# Allegro board ST-LINKV3.brd
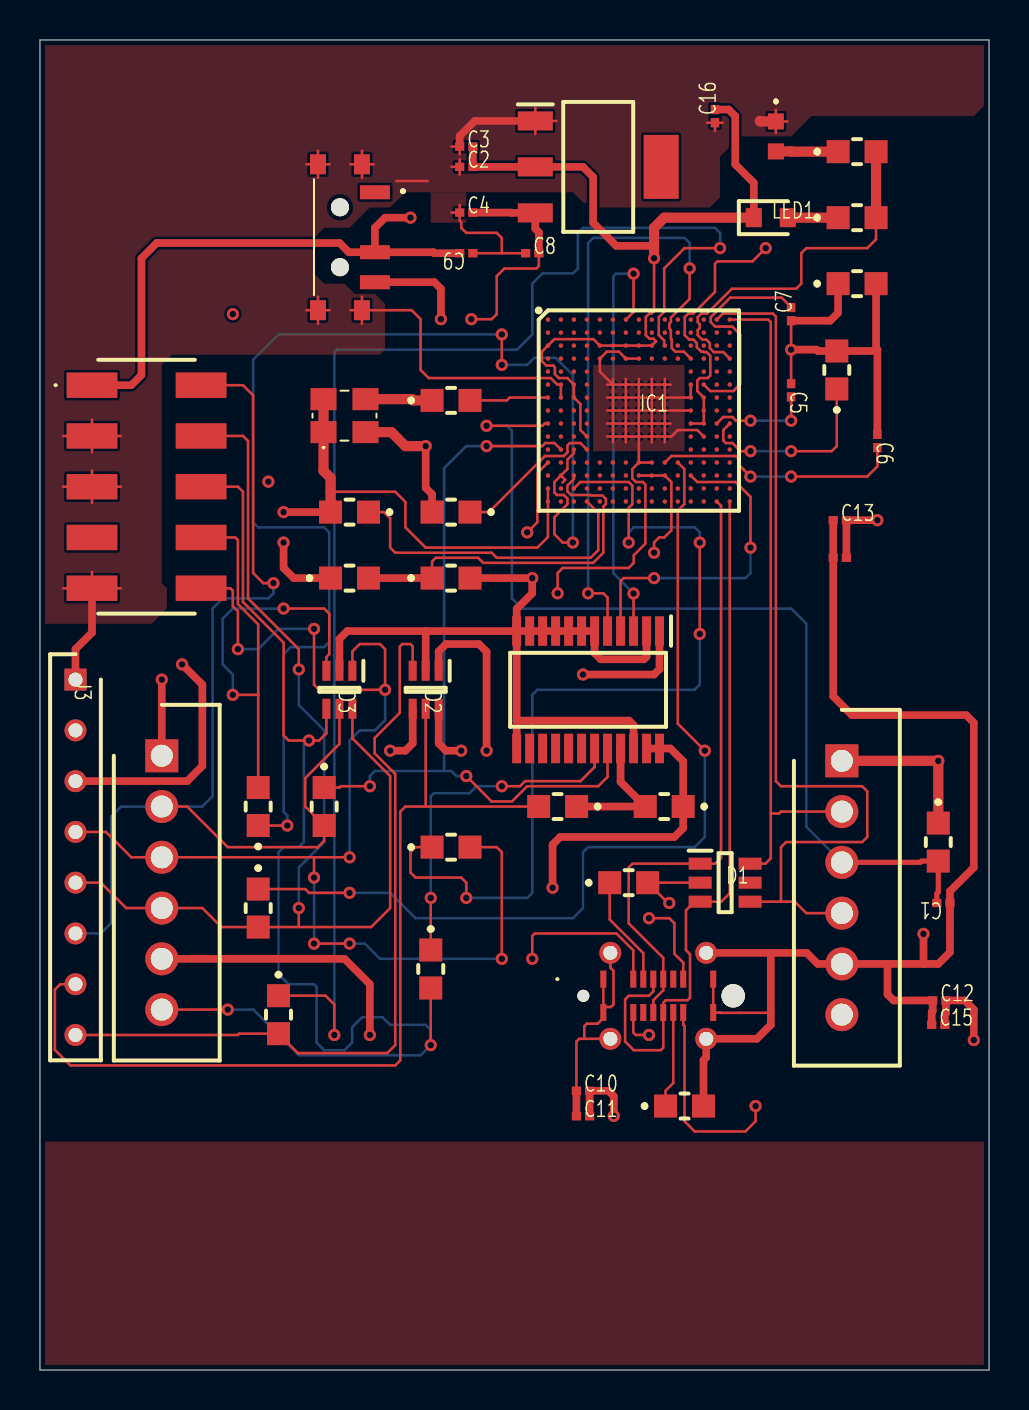
[diagram p0: board, top side]
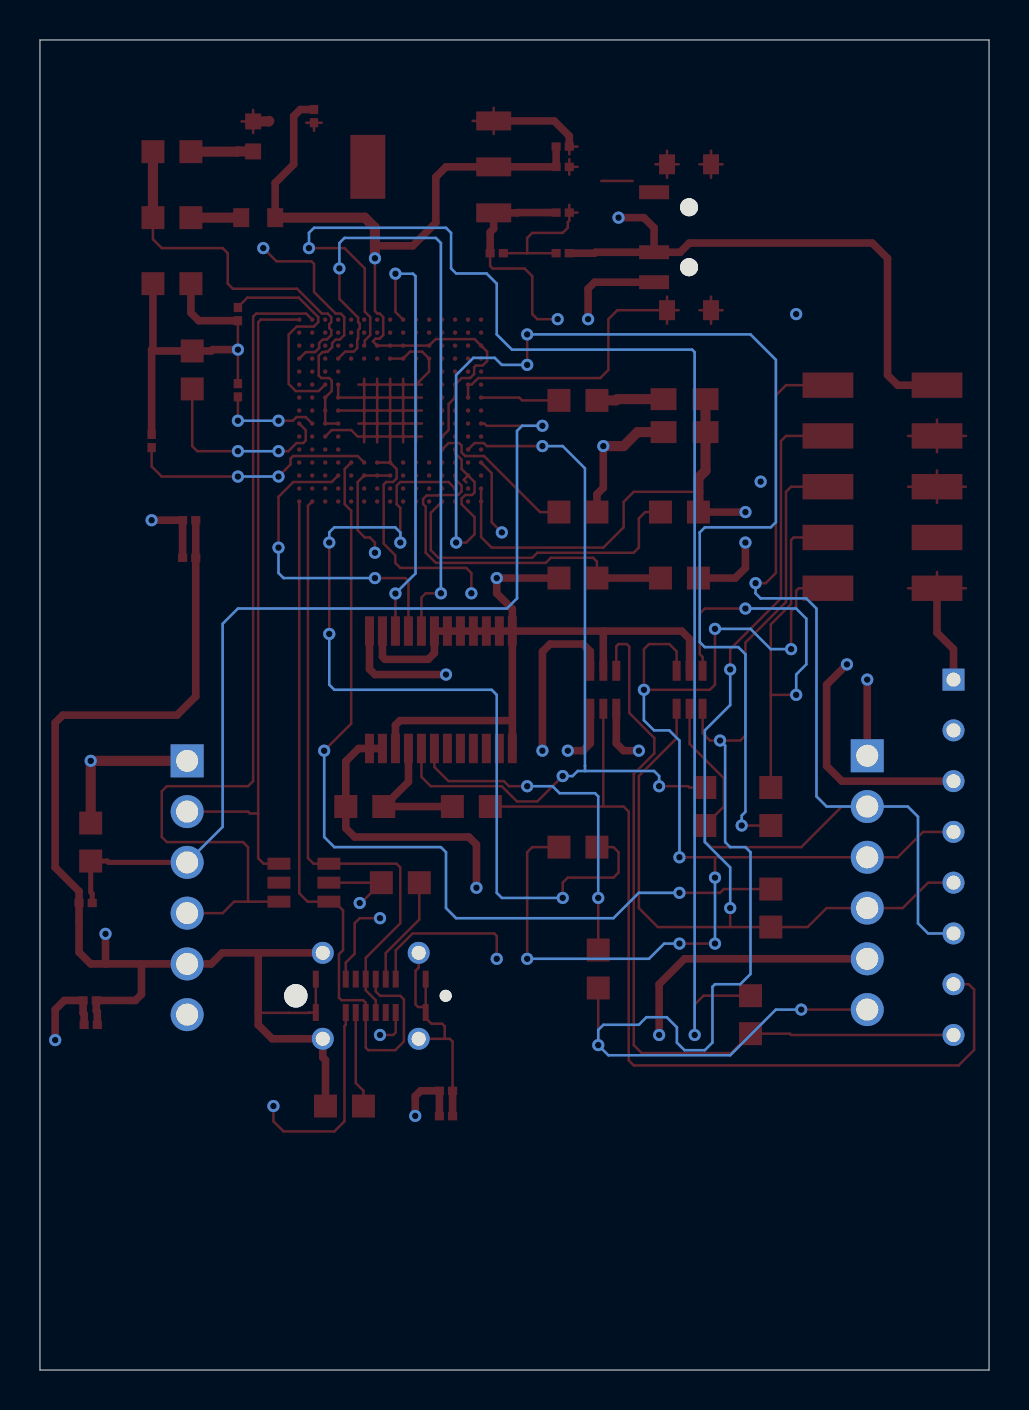
[diagram p1: board, bottom side, seen from below]

Outline 47.5 x 66.55 mm; copper layers: TOP, GND, POWER, BOTTOM. Coordinates in mm from the lower left corner of the outline.
Outline path: 0,66.55 47.5,66.55 47.5,0 0,0 0,66.55

## Design rules (mm)
constraint set DEFAULT: min track width 0.127
net group C10: nets C10 LINK_RX
net group DNDP: nets DN DP
net group L2: nets L2 TMS/SWDIO
net group L3: nets L3 TDI
net group LINK_TX: nets LINK_TX R2
net group M11: nets M11 TCLK/SWCLK
net group NRST: nets NRST P3
net group R4: nets N39518 R4
net group R6: nets R6 TDO/SWO
net group CLKDIO: nets SWCLK/PA14
net group D15: nets D15 N52044 N52750

## Placement (name value [footprint] x y rotation side)
C1  100nF  [CAPC0603X33N]  45.21 23.37 180 top
C2  100nF  [CAPC0603X33N]  21.34 60.2 0 top
C3  10uF  [CAPC0603X33N]  21.34 61.21 0 top
C4  10uF  [CAPC0603X33N]  21.34 57.91 0 top
C5  2.2uF  [CAPC0603X33N]  37.59 49.02 270 top
C6  2.2uF  [CAPC0603X33N]  41.91 46.48 270 top
C7  2.2uF  [CAPC0603X33N]  37.59 52.83 90 top
C8  100nF  [CAPC0603X33N]  24.64 55.88 0 top
C9  100nF  [CAPC0603X33N]  21.34 55.88 180 top
C10  100nF  [CAPC0603X33N]  27.18 13.97 0 top
C11  100nF  [CAPC0603X33N]  27.18 12.7 0 top
C12  100nF  [CAPC0603X33N]  45.01 18.49 0 top
C13  100nF  [CAPC0603X33N]  40.03 42.52 0 top
C14  100nF  [CAPC0603X33N]  40.03 40.64 0 top
C15  100nF  [CAPC0603X33N]  44.96 17.27 0 top
C16  100nF  [CAPC0603X33N]  33.78 62.74 90 top
D1  SRV05-4ATCT  [SOT95P280X145-6N]  34.29 24.38 0 top
D2  SMF05C.TCT  [SOT65P210X110-6N]  19.3 34.04 270 top
D3  SMF05C.TCT  [SOT65P210X110-6N]  14.99 34.04 270 top
IC1  STM32F723IEK6  [BGA201C65P15X15_1000X1000X60]  29.97 48.01 0 top
IC2  LM1117MPX-33NOPB  [SOT230P700X180-4N]  27.94 60.2 0 top
IC3  SN74LVC8T245PWR  [SOP65P640X120-24N]  27.43 34.04 270 top
J1  280372-1  [SHDR6W63P0X254_1X6_1780X500X1280P]  40.13 30.48 270 top
J2  219320-0001  [2193200001]  28.19 19.56 0 top
J3  08-0625-70  [HDRV8W51P0X254_1X8_2032X254X816P]  1.78 34.54 270 top
J4  280372-1  [SHDR6W63P0X254_1X6_1780X500X1280P]  6.1 30.73 270 top
J5  95278-401A10LF  [95278401A10LF]  5.33 44.2 270 top
LED1  SM0603GCL  [LEDC1608X60N]  36.58 57.66 0 top
LED2  -  [SM0603SRC]  36.83 61.72 180 top
R1  4.7K  [ERA6AEB1020V]  15.49 42.93 180 top
R2  4.7K  [ERA6AEB1020V]  15.49 39.62 0 top
R3  4.7K  [ERA6AEB1020V]  20.57 39.62 0 top
R4  100K  [ERA6AEB1020V]  31.24 28.19 180 top
R5  100  [ERA6AEB1020V]  40.89 54.36 0 top
R6  100K  [ERA6AEB1020V]  44.96 26.42 270 top
R7  100  [ERA6AEB1020V]  25.91 28.19 180 top
R8  100  [ERA6AEB1020V]  11.94 17.78 270 top
R9  10K  [ERA6AEB1020V]  32.26 13.21 0 top
R10  10K  [ERA6AEB1020V]  29.46 24.38 0 top
R11  10K  [ERA6AEB1020V]  20.57 42.93 180 top
R12  3K  [ERA6AEB1020V]  39.88 50.04 90 top
R13  100  [ERA6AEB1020V]  40.89 57.66 0 top
R14  100  [ERA6AEB1020V]  10.92 23.11 270 top
R15  100  [ERA6AEB1020V]  40.89 60.96 0 top
R16  100  [ERA6AEB1020V]  14.22 28.19 270 top
R17  100  [ERA6AEB1020V]  19.56 20.07 270 top
R18  100  [ERA6AEB1020V]  10.92 28.19 90 top
R19  100  [ERA6AEB1020V]  20.57 26.16 0 top
R30  100  [ERA6AEB1020V]  20.57 48.51 0 top
S1  -  [PCM12SMTR]  16.76 58.93 270 top
Y1  ASE-25.000MHZ-LC-T  [ASE24576MHZLCT]  15.24 47.75 0 top

## Library data of the parts
C1-C16 = GRM033D70E105ME15D
D1 = SRV05-4ATCT
D2 D3 = SMF05C.TCT
IC1 = STM32F723IEK6
IC2 = LM1117MPX-33NOPB
IC3 = SN74LVC8T245PWR
J1 J4 = 280372-1
J2 = 219320-0001
J3 = 08-0625-70
J5 = 95278-401A10LF
LED1 = SM0603GCL
LED2 = SM0603SRC
R1-R19 R30 = ERA-6ARB472V
S1 = PCM12SMTR
Y1 = ASE-25.000MHZ-LC-T

## Footprints (pads in the part's own frame, mm; a bottom-side part is the same pattern mirrored in y, then rotated)
95278401A10LF
  rect 1.27x2.54 smd: 1(-5.08,-2.73) 2(-5.08,2.73) 3(-2.54,-2.73) 4(-2.54,2.73) 5(0,-2.73) 6(0,2.73) 7(2.54,-2.73) 8(2.54,2.73) 9(5.08,-2.73) 10(5.08,2.73)
2193200001
  round 0.6 hole 0.6 unplated: (-1,-0.835)
  round 1.17 hole 1.17 unplated: (6.5,-0.835)
  rect 0.3x0.85 smd: A1(0,0) A4(1.5,0) A5(2,0) A6(2.5,0) A7(3,0) A8(3.5,0) A9(4,0) A12(5.5,0) B1(5.5,-1.67) B4(4,-1.67) B5(3.5,-1.67) B6(3,-1.67) B7(2.5,-1.67) B8(2,-1.67) B9(1.5,-1.67) B12(0,-1.67)
  round 1.1 hole 0.7: MH3(0.35,1.315) MH4(5.15,1.315) MH5(5.15,-2.985) MH6(0.35,-2.985)
ASE24576MHZLCT
  rect 1.3x1.1 smd: 1(-1.05,-0.825) 2(1.05,-0.825) 3(1.05,0.825) 4(-1.05,0.825)
BGA201C65P15X15_1000X1000X60
  round 0.224 smd: A1(-4.55,4.55) A2(-3.9,4.55) A3(-3.25,4.55) A4(-2.6,4.55) A5(-1.95,4.55) A6(-1.3,4.55) A7(-0.65,4.55) A8(0,4.55) A9(0.65,4.55) A10(1.3,4.55) A11(1.95,4.55) A12(2.6,4.55) A13(3.25,4.55) A14(3.9,4.55) A15(4.55,4.55) B1(-4.55,3.9) B2(-3.9,3.9) B3(-3.25,3.9) B4(-2.6,3.9) B5(-1.95,3.9) B6(-1.3,3.9) B7(-0.65,3.9) B8(0,3.9) B9(0.65,3.9) B10(1.3,3.9) B11(1.95,3.9) B12(2.6,3.9) B13(3.25,3.9) B14(3.9,3.9) B15(4.55,3.9) C1(-4.55,3.25) C2(-3.9,3.25) C3(-3.25,3.25) C4(-2.6,3.25) C5(-1.95,3.25) C6(-1.3,3.25) C7(-0.65,3.25) C8(0,3.25) C9(0.65,3.25) C10(1.3,3.25) C11(1.95,3.25) C12(2.6,3.25) C13(3.25,3.25) C14(3.9,3.25) C15(4.55,3.25) D1(-4.55,2.6) D2(-3.9,2.6) D3(-3.25,2.6) D4(-2.6,2.6) D5(-1.95,2.6) D6(-1.3,2.6) D7(-0.65,2.6) D8(0,2.6) D9(0.65,2.6) D10(1.3,2.6) D11(1.95,2.6) D12(2.6,2.6) D13(3.25,2.6) D14(3.9,2.6) D15(4.55,2.6) E1(-4.55,1.95) E2(-3.9,1.95) E3(-3.25,1.95) E4(-2.6,1.95) E12(2.6,1.95) E13(3.25,1.95) E14(3.9,1.95) E15(4.55,1.95) F1(-4.55,1.3) F2(-3.9,1.3) F3(-3.25,1.3) F4(-2.6,1.3) F6(-1.3,1.3) F7(-0.65,1.3) F8(0,1.3) F9(0.65,1.3) F10(1.3,1.3) F12(2.6,1.3) F13(3.25,1.3) F14(3.9,1.3) F15(4.55,1.3) G1(-4.55,0.65) G2(-3.9,0.65) G3(-3.25,0.65) G4(-2.6,0.65) G6(-1.3,0.65) G7(-0.65,0.65) G8(0,0.65) G9(0.65,0.65) G10(1.3,0.65) G12(2.6,0.65) G13(3.25,0.65) G14(3.9,0.65) G15(4.55,0.65) H1(-4.55,0) H2(-3.9,0) H3(-3.25,0) H4(-2.6,0) H6(-1.3,0) H7(-0.65,0) H8(0,0) H9(0.65,0) H10(1.3,0) H12(2.6,0) H13(3.25,0) H14(3.9,0) H15(4.55,0) J1(-4.55,-0.65) J2(-3.9,-0.65) J3(-3.25,-0.65) J4(-2.6,-0.65) J6(-1.3,-0.65) J7(-0.65,-0.65) J8(0,-0.65) J9(0.65,-0.65) J10(1.3,-0.65) J12(2.6,-0.65) J13(3.25,-0.65) J14(3.9,-0.65) J15(4.55,-0.65) K1(-4.55,-1.3) K2(-3.9,-1.3) K3(-3.25,-1.3) K4(-2.6,-1.3) K6(-1.3,-1.3) K7(-0.65,-1.3) K8(0,-1.3) K9(0.65,-1.3) K10(1.3,-1.3) K12(2.6,-1.3) K13(3.25,-1.3) K14(3.9,-1.3) K15(4.55,-1.3) L1(-4.55,-1.95) L2(-3.9,-1.95) L3(-3.25,-1.95) L4(-2.6,-1.95) L12(2.6,-1.95) L13(3.25,-1.95) L14(3.9,-1.95) L15(4.55,-1.95) M1(-4.55,-2.6) M2(-3.9,-2.6) M3(-3.25,-2.6) M4(-2.6,-2.6) M5(-1.95,-2.6) M6(-1.3,-2.6) M7(-0.65,-2.6) M8(0,-2.6) M9(0.65,-2.6) M10(1.3,-2.6) M11(1.95,-2.6) M12(2.6,-2.6) M13(3.25,-2.6) M14(3.9,-2.6) M15(4.55,-2.6) N1(-4.55,-3.25) N2(-3.9,-3.25) N3(-3.25,-3.25) N4(-2.6,-3.25) N5(-1.95,-3.25) N6(-1.3,-3.25) N7(-0.65,-3.25) N8(0,-3.25) N9(0.65,-3.25) N10(1.3,-3.25) N11(1.95,-3.25) N12(2.6,-3.25) N13(3.25,-3.25) N14(3.9,-3.25) N15(4.55,-3.25) P1(-4.55,-3.9) P2(-3.9,-3.9) P3(-3.25,-3.9) P4(-2.6,-3.9) P5(-1.95,-3.9) P6(-1.3,-3.9) P7(-0.65,-3.9) P8(0,-3.9) P9(0.65,-3.9) P10(1.3,-3.9) P11(1.95,-3.9) P12(2.6,-3.9) P13(3.25,-3.9) P14(3.9,-3.9) P15(4.55,-3.9) R1(-4.55,-4.55) R2(-3.9,-4.55) R3(-3.25,-4.55) R4(-2.6,-4.55) R5(-1.95,-4.55) R6(-1.3,-4.55) R7(-0.65,-4.55) R8(0,-4.55) R9(0.65,-4.55) R10(1.3,-4.55) R11(1.95,-4.55) R12(2.6,-4.55) R13(3.25,-4.55) R14(3.9,-4.55) R15(4.55,-4.55)
CAPC0603X33N
  rect 0.46x0.42 smd: 1(-0.33,0) 2(0.33,0)
ERA6AEB1020V
  rect 1.15x1.15 smd: 1(-0.95,0) 2(0.95,0)
HDRV8W51P0X254_1X8_2032X254X816P
  rect 1.1x1.1 hole 0.7: 1(0,0)
  round 1.1 hole 0.7: 2(2.54,0) 3(5.08,0) 4(7.62,0) 5(10.16,0) 6(12.7,0) 7(15.24,0) 8(17.78,0)
LEDC1608X60N
  rect 0.8x0.95 smd: 1(-0.85,0) 2(0.85,0)
PCM12SMTR
  round 0.9 hole 0.9 unplated: (0.75,-1.75) (3.75,-1.75)
  rect 0.7x1.5 smd: 1(0,0) 2(3,0) 3(4.5,0)
  rect 1x0.8 smd: MP1(-1.4,-0.65) MP2(-1.4,-2.85) MP3(5.9,-2.85) MP4(5.9,-0.65)
SHDR6W63P0X254_1X6_1780X500X1280P
  rect 1.65x1.65 hole 1.1: 1(0,0)
  round 1.65 hole 1.1: 2(2.54,0) 3(5.08,0) 4(7.62,0) 5(10.16,0) 6(12.7,0)
SM0603SRC
  rect 0.8x0.8 smd: 1(0,-0.75) 2(0,0.75)
SOP65P640X120-24N
  rect 1.475x0.45 smd: 1(-2.938,3.575) 2(-2.938,2.925) 3(-2.938,2.275) 4(-2.938,1.625) 5(-2.938,0.975) 6(-2.938,0.325) 7(-2.938,-0.325) 8(-2.938,-0.975) 9(-2.938,-1.625) 10(-2.938,-2.275) 11(-2.938,-2.925) 12(-2.938,-3.575) 13(2.938,-3.575) 14(2.938,-2.925) 15(2.938,-2.275) 16(2.938,-1.625) 17(2.938,-0.975) 18(2.938,-0.325) 19(2.938,0.325) 20(2.938,0.975) 21(2.938,1.625) 22(2.938,2.275) 23(2.938,2.925) 24(2.938,3.575)
SOT65P210X110-6N
  rect 1x0.4 smd: 1(-0.95,0.65) 2(-0.95,0) 3(-0.95,-0.65) 4(0.95,-0.65) 5(0.95,0) 6(0.95,0.65)
SOT95P280X145-6N
  rect 1.15x0.6 smd: 1(-1.25,0.95) 2(-1.25,0) 3(-1.25,-0.95) 4(1.25,-0.95) 5(1.25,0) 6(1.25,0.95)
SOT230P700X180-4N
  rect 1.75x0.95 smd: 1(-3.15,2.3) 2(-3.15,0) 3(-3.15,-2.3)
  rect 1.75x3.2 smd: 4(3.15,0)

## Nets
+3V3: C2.2 C3.2 C10.2 C11.2 C12.2 C13.2 C14.2 C15.2 C16.2 D2.4 IC1.C1 IC1.C5 IC1.C6 IC1.C7 IC1.C8 IC1.C9 IC1.F3 IC1.G3 IC1.G13 IC1.H13 IC1.J12 IC1.J13 IC1.K4 IC1.N8 IC1.N9 IC1.N10 IC1.P1 IC1.R1 IC2.2 IC3.1 J1.1 J3.3 LED1.1(\K\) R1.2 R6.1 S1.3(\NO\) Y1.1 Y1.4(\VDD\)
VBUS: C4.2 C8.2 D1.5(\VCC\) D2.6 IC2.3 J2.A4 J2.A9 J2.B4 J2.B9 J3.2
0: C1.1 C2.1 C3.1 C4.1 C5.1 C6.1 C7.1 C8.1 C9.1 C10.1 C11.1 C12.1 C13.1 C14.1 C15.1 C16.1 D1.2 D2.2(\COMMON_ANODE\) D3.2(\COMMON_ANODE\) IC1.D5 IC1.D7 IC1.D8 IC1.F2 IC1.F6 IC1.F7 IC1.F8 IC1.F9(\VSS_9\) IC1.F10 IC1.F12 IC1.G2 IC1.G6 IC1.G7 IC1.G8 IC1.G9 IC1.G10 IC1.G12 IC1.H6 IC1.H7 IC1.H8 IC1.H9 IC1.H10 IC1.H12 IC1.J6 IC1.J7 IC1.J8 IC1.J9 IC1.J10 IC1.K6 IC1.K7 IC1.K8 IC1.K9 IC1.K10 IC1.K13 IC1.M1 IC1.M8 IC1.M9 IC2.1 IC3.2 IC3.6 IC3.7 IC3.8 IC3.9 IC3.10 IC3.11 IC3.12 IC3.13 IC3.22 J1.5 J2.A1 J2.A12 J2.B1 J2.B12 J2.MH3 J2.MH4 J2.MH5 J2.MH6 J3.1 J4.5 J5.3 J5.5 J5.9 LED2.1 R3.2 R5.1 R5.2 R9.2 R10.2 R11.2 R12.2 S1.MP1 S1.MP2 S1.MP3 S1.MP4 Y1.2
A7: IC1.A7 IC3.3
C5: C5.2 IC1.J14
C10: IC1.C10 R8.1
D12: IC1.D12 IC3.5
D15: IC1.D15 R13.2 R15.2
DN: D1.1 IC1.R14 J2.A7 J2.B7
DP: D1.3 IC1.R15 J2.A6(\[DP1\) J2.B6
F13: C7.2 IC1.F13
J1: C1.2 IC1.J1 J1.3 R6.2
J15: IC1.J15 R12.1
L2: IC1.L2 IC3.20 R16.1
L3: IC1.L3 IC1.N2 R18.1
L4: IC1.L4 R11.1
LINK_RX: D2.3 J3.8 R8.2
LINK_TX: D2.5 J3.7 R7.2
M10: C6.2 IC1.M10
M11: IC1.M11 R14.1
N12: IC1.N12 IC3.4
NRST: D3.1 J3.4 J4.3 J5.10 R19.2
P3: IC1.P3 R19.1
PA0: IC1.N3 R2.2 R3.1
PB1: IC1.R4 R1.1
R2: IC3.21 R4.2 R7.1
R4: IC1.G1 R30.2
R6: IC3.19 R17.1
R9: J2.B5 R9.1
R10: J2.A5 R10.1
SWCLK/PA14: D1.4 IC1.A14 J1.4
SWDIO/PA13: D1.6 IC1.A15 J1.2
TCLK/SWCLK: D3.6 J3.5 J4.4 J5.4 R14.2
TDI: D3.3 J5.8 R18.2
TDO/SWO: D3.4 J4.6 J5.6 R17.2
TMS/SWDIO: D3.5 J3.6 J4.2 J5.2 R16.2
VSENS: C9.2 D2.1 IC3.23 IC3.24(\VCCB_2\) J4.1 J5.1 R2.1 R4.1 S1.2
N39518: R30.1 Y1.3
N52044: LED2.2(\K\) R15.1
N52750: LED1.2 R13.1

Pads without a net: IC1 A1 A2 A3 A4 A5 A6 A8 A9 A10 A11 A12 A13 B1 B2 B3 B4 B5 B6 B7 B8 B9 B10 B11 B12 B13 B14 B15 C2 C3 C4 C11 C12 C13 C14 C15 D1 D2 D3 D4 D6 D9 D10 D11 D13 D14 E1 E2 E3 E4 E12 E13 E14 E15 F1 F4 F14 F15 G4 G14 G15 H1 H2 H3 H4 H14 H15 J2 J3 J4 K1 K2 K3 K12 K14 K15 L1 L12 L13 L14 L15 M2 M3 M4 M5 M6 M7 M12 M13 M14 M15 N1 N4 N5 N6 N7 N11 N13 N14 N15 P2 P4 P5 P6 P7 P8 P9 P10 P11 P12 P13 P14 P15 R2 R3 R5 R6 R7 R8 R9 R10 R11 R12 R13; IC2 4; IC3 14 15 16 17 18; J1 6; J2 A8 B8; J5 7; S1 1

## Via types
v1: diameter 0.61, hole 0.33, TOP to BOTTOM, 79 vias

## Routing (per net, layer and track width the routed paths; a pad name or vN(x,y) marks a point on that pad's centre or on a via; arc(x,y) is an arc through that point)
+3V3: length 277.9
  TOP w0.127: IC1.J12 IC1.J13 IC1.H13 IC1.G13 32.9,48.98 32.9,49.5 33.02,49.63 33.42,49.63 33.55,49.76 33.55,50.75 33.37,50.93 33.22,50.93 33.2,50.95 33.1,50.95 32.87,51.18 32.87,51.38 32.7,51.56 32.49,51.56 32.27,51.78 32.27,52.68 32.45,52.86 32.7,52.86 33.78,53.94 33.78,55.35 33.91,55.47 35.66,55.47 v1(36.32,56.13) ; IC1.N8 IC1.N9 IC1.N10 31.6,44.43 31.6,42.01 31.24,41.66 30.99,41.66 30.73,41.4 v1(30.73,40.89) ; v1(30.73,55.63) 30.73,52.99 30.61,52.86 30.5,52.86 30.32,52.68 30.32,51.78 30.5,51.6 30.7,51.6 30.84,51.47 IC1.C9 IC1.C8 IC1.C7 IC1.C6 IC1.C5 27.7,51.58 25.75,51.58 25.64,51.47 IC1.C1 25.12,50.95 25.12,50.48 25.34,50.26 25.69,50.26 25.77,50.18 25.77,49.83 25.97,49.63 26.4,49.63 IC1.F3 IC1.G3 27.05,48.33 27.05,47.03 IC1.K4 ; IC1.P1 IC1.R1 25.42,41.68 24.89,41.15 19.3,41.15 18.29,42.16 18.29,43.43 17.78,43.94 14.54,43.94
  TOP w0.381: 30.73,56.25 28.84,56.25 27.69,57.4 27.69,59.69 27.18,60.2 IC2.2 C2.2 C3.2 ; D2.4 18.65,31.35 18.29,30.99 v1(17.53,30.99) ; C15.2 45.29,17.8 45.34,17.85 C12.2 46.28,18.49 46.74,18.03 v1(46.74,16.51) ; S1.3 19.74,54.43 20.07,54.1 v1(20.07,52.58) ; v1(41.91,42.52) C13.2 C14.2 ; IC3.1 31.01,35.07 30.73,34.8 v1(27.18,34.8) ; C11.2 C10.2 28.45,13.97 28.72,13.7 v1(28.72,12.72) ; R1.2 v1(12.19,42.93) ; LED1.1 35.73,59.4 34.8,60.32 34.8,62.74 34.47,63.07 C16.2 ; v1(7.11,35.31) 8.13,34.29 8.13,30.23 7.37,29.46 J3.3
  TOP w0.508: J1.1 v1(44.96,30.48) R6.1 ; R1.2 14.54,44.64 14.19,44.99 Y1.1 Y1.4 ; v1(30.73,55.63) 30.73,57.15 31.24,57.66 LED1.1
  POWER w0.381: 10.67,34.8 9.14,34.8 8.64,35.31 v1(7.11,35.31) ; 10.67,34.8 10.67,41.4 v1(12.19,42.93) 12.19,55.5 12.83,56.13 17.27,56.13 17.78,55.63 v1(30.73,55.63) ; 10.67,34.8 10.67,32.26 12.45,30.48 17.02,30.48 v1(17.53,30.99) 19.56,33.02 44.96,33.02 ; v1(30.73,40.89) 30.73,42.16 31.09,42.52 v1(41.91,42.52) 44.35,42.52 44.96,41.91 44.96,33.02 ; 44.96,33.02 v1(44.96,30.48) 44.96,23.11 45.97,22.1 45.97,16.51 ; v1(46.74,16.51) 45.97,16.51 ; 45.97,16.51 45.97,12.95 45.21,12.19 29.24,12.19 v1(28.72,12.72)
VBUS: length 166.3
  TOP w0.127: v1(35.81,13.21) 35.81,12.45 35.31,11.94 32.77,11.94 32.26,12.45 32.26,17.21 32.19,17.27 J2.B4 ; v1(30.48,16.76) 29.82,16.76 29.69,16.89 J2.B9 ; C8.2 24.97,55.24 24.84,55.11 23.24,55.11 22.86,54.73 22.86,52.83 22.61,52.58 v1(21.59,52.58) ; v1(24.64,20.57) 24.64,21.72 24.77,21.84 28.85,21.84 29.69,21 J2.A4 ; v1(30.48,22.61) 31.5,22.61 31.75,22.35 31.75,20.83 32.19,20.38 J2.A9
  TOP w0.381: C4.2 23.58,57.91 23.6,57.9 IC2.3 24.79,57.11 24.97,56.93 C8.2 ; D2.6 19.95,31.35 20.32,30.99 v1(21.08,30.99)
  GND w0.381: v1(9.65,52.83) 18.03,52.83 19.3,54.1 21.34,54.1 21.59,53.85 v1(21.59,52.58)
  POWER w0.381: 17.53,22.26 17.53,28.45 20.07,30.99 v1(21.08,30.99) ; 17.53,22.26 24.22,22.26 24.64,21.84 v1(24.64,20.57) ; 17.53,22.26 7.78,22.26 7.37,21.84 3.56,21.84 ; 3.56,32 3.56,51.82 4.57,52.83 v1(9.65,52.83) ; 3.56,32 3.56,21.84 ; 3.56,32 J3.2 ; 30.48,14.99 35.31,14.99 35.81,14.48 v1(35.81,13.21) ; 30.48,14.99 4.57,14.99 3.56,16 3.56,21.84 ; 30.48,14.99 v1(30.48,16.76)
0: length 298.4
  TOP w0.127: 23.11,55.88 23.11,56.64 22.86,56.9 21.34,56.9 21.08,57.15 21.08,57.44 21.01,57.51 C4.1 ; 23.11,55.88 C9.1 ; 23.11,55.88 C8.1 ; IC1.F9 30.62,49.6 ; IC1.F9 30.62,49.02 ; IC1.F9 30.91,49.31 ; IC1.F9 30.33,49.31 ; IC1.K10 31.27,47 ; IC1.K10 31.27,46.42 ; IC1.K10 IC1.K9 ; IC1.K10 31.6,46.71 31.92,47.03 32.9,47.03 IC1.K13 ; IC1.M8 29.65,45.08 29.65,44.61 29.83,44.43 30.17,44.43 30.3,44.3 30.3,41.35 29.72,40.77 29.72,40.39 29.46,40.13 26.16,40.13 25.91,39.88 v1(25.91,38.86) ; IC1.M8 IC1.M9 ; IC1.M8 IC1.K8 ; S1.MP4 18.6,53.03 19.05,52.58 19.05,50.04 19.46,49.63 25.57,49.63 25.89,49.31 IC1.F2 IC1.G2 ; S1.MP4 16.11,52.35 ; S1.MP4 16.11,53.71 ; S1.MP4 15.54,53.03 ; 29.68,49.31 IC1.F8 ; IC1.F8 30.26,49.31 ; IC1.F8 29.97,49.02 ; IC1.F8 29.97,49.6 ; 24.79,61.85 IC2.1 ; IC2.1 24.79,63.15 ; IC2.1 25.84,62.5 ; J2.MH3 28.54,20.13 28.7,19.97 28.7,18.29 28.57,18.16 28.19,18.16 ; 28.19,18.16 J2.A1 ; 28.19,18.16 J2.B12 28.19,17.61 27.91,17.33 27.37,17.33 27.24,17.2 27.24,16.57 ; 20.6,60.2 C2.1 ; C2.1 21.01,60.59 ; C2.1 21.01,59.81 ; 30.62,46.42 IC1.K9 ; IC1.K9 IC1.K8 ; IC1.K9 30.62,47 ; 13.91,52.35 S1.MP3 ; S1.MP3 13.34,53.03 ; S1.MP3 13.91,53.71 ; S1.MP3 14.49,53.03 ; IC1.F12 IC1.G12 IC1.G10 ; 30.33,47.36 IC1.J9 ; IC1.J9 30.62,47.65 ; IC1.J9 30.91,47.36 ; IC1.J9 30.62,47.07 ; IC1.H6 28.96,48.01 ; IC1.H6 28.67,48.3 ; IC1.H6 28.38,48.01 ; IC1.H6 28.67,47.72 ; IC1.D8 IC1.D7 28.97,50.95 28.37,50.95 IC1.D5 28.02,49.96 IC1.F6 ; 13.91,59.65 S1.MP2 ; S1.MP2 13.34,60.33 ; S1.MP2 13.91,61.01 ; S1.MP2 14.49,60.33 ; 31.27,48.37 IC1.G10 ; IC1.G10 30.98,48.66 ; IC1.G10 31.27,48.95 ; LED2.1 37.41,62.47 ; LED2.1 36.83,61.89 ; LED2.1 36.83,63.05 ; IC1.M1 24.89,44.88 24.89,42.42 v1(24.38,41.91) ; J5.9 2.6,39.93 ; J5.9 1.16,39.12 ; J5.9 4.05,39.12 ; IC1.H10 31.27,48.3 ; IC1.H10 30.98,48.01 ; IC1.H10 31.27,47.72 ; IC1.H10 IC1.H12 ; IC1.F10 31.56,49.31 ; IC1.F10 30.98,49.31 ; IC1.F10 31.27,49.6 ; IC1.F10 31.27,49.02 ; C16.1 34.17,62.41 ; C16.1 33.78,62 ; C16.1 33.39,62.41 ; C10.1 26.85,16.43 26.99,16.57 27.24,16.57 ; IC1.F6 28.67,49.6 ; IC1.F6 28.96,49.31 ; IC1.F6 28.38,49.31 ; IC1.F6 28.67,49.02 ; J2.A12 J2.B1 34.03,17.89 34.05,17.87 35.05,17.87 35.05,17.87 36.58,17.87 ; 2.6,45.92 J5.3 ; J5.3 4.05,46.74 ; J5.3 2.6,47.55 ; J5.3 1.16,46.74 ; 16.11,59.65 S1.MP1 ; S1.MP1 15.54,60.33 ; S1.MP1 16.69,60.33 ; S1.MP1 16.11,61.01 ; 29.03,48.01 IC1.H7 ; IC1.H7 29.61,48.01 ; IC1.H7 29.32,48.3 ; IC1.H7 29.32,47.72 ; C4.1 21.01,58.3 ; C4.1 20.6,57.91 ; IC1.G6 28.67,48.95 ; IC1.G6 28.38,48.66 ; IC1.G6 28.67,48.37 ; IC1.G6 28.96,48.66 ; 30.33,48.01 IC1.H9 ; IC1.H9 30.62,47.72 ; IC1.H9 30.62,48.3 ; IC1.H9 30.91,48.01 ; 29.32,48.37 IC1.G7 ; IC1.G7 29.32,48.95 ; IC1.G7 29.61,48.66 ; IC1.G7 29.03,48.66 ; 28.67,46.42 IC1.K6 ; IC1.K6 28.38,46.71 ; IC1.K6 28.67,47 ; IC1.K6 28.96,46.71 ; 20.6,61.21 C3.1 21.01,60.83 ; IC1.J6 28.67,47.65 ; IC1.J6 28.96,47.36 ; IC1.J6 28.38,47.36 ; IC1.J6 28.67,47.07 ; 30.98,47.36 IC1.J10 ; IC1.J10 31.27,47.07 ; IC1.J10 31.27,47.65 ; IC1.J10 31.56,47.36 ; 30.62,48.37 IC1.G9 ; IC1.G9 30.91,48.66 ; IC1.G9 30.62,48.95 ; IC1.G9 30.33,48.66 ; 29.68,48.01 IC1.H8 ; IC1.H8 29.97,47.72 ; IC1.H8 30.26,48.01 ; IC1.H8 29.97,48.3 ; 29.32,47.07 IC1.J7 ; IC1.J7 29.61,47.36 ; IC1.J7 29.32,47.65 ; IC1.J7 29.03,47.36 ; IC1.K7 29.61,46.71 ; IC1.K7 29.03,46.71 ; IC1.K7 29.32,46.42 ; IC1.K7 29.32,47 ; 27.24,16.57 J2.MH6 ; IC1.K8 29.68,46.71 ; IC1.K8 29.97,47 ; 19.4,59.49 17.84,59.49 ; IC1.J8 29.97,47.65 ; IC1.J8 30.26,47.36 ; IC1.J8 29.97,47.07 ; IC1.J8 29.68,47.36 ; v1(31.5,23.37) 31.43,23.37 R10.2 D1.2 ; IC1.F7 29.32,49.6 ; IC1.F7 29.32,49.02 ; IC1.F7 29.61,49.31 ; IC1.F7 29.03,49.31 ; 1.16,44.2 J5.5 ; J5.5 4.05,44.2 ; J5.5 2.6,43.38 ; J5.5 2.6,45.01 ; 45.54,22.43 45.45,22.34 ; C7.1 v1(37.59,51.05) C5.1 ; IC1.G8 29.97,48.95 ; IC1.G8 30.26,48.66 ; IC1.G8 29.68,48.66 ; IC1.G8 29.97,48.37
  TOP w0.381: R11.2 19.62,43.82 19.3,44.14 v1(19.3,46.23) ; 42.42,20.32 J1.5 38.93,20.32 38.37,20.87 36.58,20.87 ; 42.42,20.32 44.22,20.32 ; 42.42,20.32 42.42,18.8 42.72,18.49 C12.1 44.68,17.96 44.63,17.91 C15.1 ; 23.86,32.49 IC3.12 ; 23.86,32.49 29.48,32.49 29.71,32.27 IC3.22 ; 23.86,32.49 IC3.13 ; IC3.12 IC3.11 IC3.9 IC3.8 IC3.7 27.76,36.97 27.76,35.87 28.07,35.56 30.23,35.56 30.36,35.69 IC3.2 ; IC3.12 23.86,38.08 24.64,38.86 v1(24.64,39.62) R3.2 ; IC3.12 19.3,36.97 ; 41.91,51.05 41.84,51.12 R5.2 ; 41.91,51.05 C6.1 ; 41.91,51.05 41.84,50.99 R12.2 38.93,50.99 38.86,51.05 v1(37.59,51.05) ; C3.1 21.01,61.74 21.76,62.5 IC2.1 ; C11.1 C10.1 ; C13.1 C14.1 39.7,33.71 40.64,32.77 46.35,32.77 46.74,32.38 46.74,25.15 45.54,23.95 C1.1 45.54,20.9 44.96,20.32 44.22,20.32 ; 36.58,20.87 36.58,17.27 35.88,16.57 J2.MH5 33.34,15.64 33.21,15.51 R9.2 ; 36.58,20.87 J2.MH4 ; 44.22,20.32 v1(44.22,21.82) ; 19.3,36.97 15.38,36.97 14.99,36.58 D3.2 ; 19.3,36.97 D2.2 ; J4.5 15.24,20.57 16.51,19.3 v1(16.51,16.76) ; J3.1 1.78,36.07 2.6,36.89 J5.9 ; R5.1 39.94,52.9 39.55,52.5 C7.1
  TOP w0.508: v1(19.3,46.23) 18.29,46.23 17.59,46.93 Y1.2 ; LED2.1 36.05,62.47 36.02,62.5
  GND w0.127: J2.MH6 29.27,16.57 ; J2.MH6 27.82,16.57 ; J2.MH6 28.54,17.3 ; J2.MH6 28.54,15.84 ; J2.MH3 28.54,21.6 ; J2.MH3 28.54,20.14 ; J2.MH3 29.27,20.87 ; J2.MH3 27.82,20.87 ; J4.5 7.1,20.57 ; J4.5 6.1,19.57 ; J4.5 6.1,21.58 ; J4.5 5.09,20.57 ; 1.78,33.82 J3.1 ; J3.1 1.05,34.54 ; J3.1 2.51,34.54 ; J3.1 1.78,35.27 ; 40.13,19.32 J1.5 ; J1.5 40.13,21.32 ; J1.5 41.13,20.32 ; J1.5 39.13,20.32 ; J2.MH4 33.34,21.6 ; J2.MH4 33.34,20.14 ; J2.MH4 32.62,20.87 ; J2.MH4 34.07,20.87 ; J2.MH5 34.07,16.57 ; J2.MH5 33.34,15.84 ; J2.MH5 32.62,16.57 ; J2.MH5 33.34,17.3
A7: length 21.7
  TOP w0.127: v1(29.71,54.85) 29.71,52.94 IC1.A7 ; IC3.3 v1(29.71,38.85)
  BOTTOM w0.127: v1(29.71,54.85) 28.83,54.85 28.7,54.73 28.7,39.86 v1(29.71,38.85)
C5: length 5.1
  TOP w0.127: C5.2 v1(37.59,47.5) ; v1(35.56,47.5) 34.84,47.5 34.66,47.68 34.2,47.68 IC1.J14
  BOTTOM w0.127: v1(37.59,47.5) v1(35.56,47.5)
C10: length 71.3
  TOP w0.127: R8.1 14.29,18.73 14.73,18.29 v1(14.73,16.76) ; IC1.C10 31.24,51.29 31.24,51.51 30.97,51.78 30.97,52.68 31.24,52.95 31.24,55.12 32.26,56.13 v1(34.04,56.13)
  BOTTOM w0.127: v1(14.73,16.76) 14.73,50.93 14.86,51.05 23.88,51.05 24.64,51.82 24.64,54.36 25.15,54.86 26.67,54.86 26.92,55.12 26.92,56.9 27.18,57.15 33.78,57.15 34.04,56.9 v1(34.04,56.13)
D12: length 32.5
  TOP w0.127: IC1.D12 32.22,50.95 31.8,50.95 31.62,51.13 31.62,51.56 31.57,51.6 31.57,52.03 31.5,52.11 31.5,52.35 31.57,52.43 31.57,52.66 32.51,53.59 v1(32.51,55.12) ; IC3.5 28.41,38.65 28.19,38.86 v1(27.43,38.86)
  BOTTOM w0.127: v1(27.43,38.86) 27.43,56.39 27.69,56.64 32.26,56.64 32.51,56.39 v1(32.51,55.12)
D15: length 19
  TOP w0.127: IC1.D15 34.2,50.93 33.73,50.93 33.52,51.13 33.52,51.38 33.35,51.56 33.14,51.56 32.92,51.78 32.92,52.03 33.02,52.13 33.02,52.33 32.92,52.43 32.92,52.68 33.1,52.86 33.39,52.86 34.63,54.1 37.85,54.1 38.1,54.36 38.1,55.88 38.35,56.13 41.4,56.13 41.84,56.58 R13.2
  TOP w0.508: R13.2 R15.2
DN: length 30.9
  TOP w0.127: IC1.R14 34.09,43.24 34.09,25.61 33.81,25.33 D1.1 29.65,25.33 29.46,25.15 29.46,22.35 31.19,20.62 J2.A7 31.19,19 30.69,18.5 J2.B7
DP: length 36.7
  TOP w0.127: J2.A6 30.69,18.94 30.47,18.72 29.46,18.72 29.28,18.54 29.28,16.44 29.72,16 31.07,16 31.19,16.13 J2.B6 31.19,18.38 31.32,18.5 32.41,18.5 32.53,18.63 32.53,20.81 32.33,21.01 32.33,23 32.76,23.43 D1.3 34.1,23.43 34.52,23.85 IC1.R15
F13: length 11.2
  TOP w0.127: C7.2 37.59,53.18 37.12,53.66 34.54,53.66 33.57,52.68 33.57,52.43 33.79,52.21 34.65,52.21 35.05,51.8 35.05,49.34 34.7,48.98 33.55,48.98 IC1.F13
J1: length 47.8
  TOP w0.127: v1(22.35,47.24) 25.15,47.24 25.26,47.36 IC1.J1
  TOP w0.254: C1.2 44.88,23.83 44.96,23.91 R6.2 44.13,25.47 44.06,25.4 J1.3
  BOTTOM w0.127: v1(22.35,47.24) 23.37,47.24 23.62,46.99 23.62,38.61 24.13,38.1 37.59,38.1 38.35,37.34 38.35,27.18 J1.3
J15: length 9.9
  TOP w0.127: IC1.J15 34.2,47.03 34.2,46.51 34.32,46.38 34.66,46.38 35.06,45.97 v1(35.56,45.97) ; R12.1 39.88,46.23 39.62,45.97 v1(37.59,45.97)
  BOTTOM w0.127: v1(37.59,45.97) v1(35.56,45.97)
L2: length 39
  TOP w0.127: v1(22.35,46.23) 25.13,46.23 25.29,46.38 25.75,46.38 IC1.L2 ; R16.1 14.99,29.14 15.06,29.21 v1(16.51,29.21) ; v1(21.34,29.72) 22.61,28.45 23.62,28.45 24.38,29.21 27.94,29.21 28.41,29.68 IC3.20
  BOTTOM w0.127: 20.22,29.97 20.59,29.97 20.84,29.72 v1(21.34,29.72) ; 20.22,29.97 20.22,30.22 20.22,30.23 20.22,45.12 21.34,46.23 v1(22.35,46.23) ; 20.22,29.97 16.76,29.97 16.51,29.72 v1(16.51,29.21)
L3: length 64.2
  TOP w0.127: IC1.N2 26.29,44.54 26.15,44.41 ; IC1.N2 26.4,45.08 26.4,45.55 26.72,45.88 IC1.L3 ; IC1.N2 25.75,44.43 25.75,43.91 25.87,43.78 26.22,43.78 26.4,43.6 26.4,43.32 25.75,42.67 25.75,41.82 26.16,41.4 v1(26.67,41.4) ; v1(23.11,50.29) v1(23.11,51.82) ; R18.1 v1(12.38,27.24)
  BOTTOM w0.127: v1(12.38,27.24) 12.38,27.74 12.19,27.93 12.19,35.81 12.55,36.17 14.22,36.17 14.48,36.42 14.48,41.91 14.22,42.16 10.92,42.16 10.67,42.42 10.67,50.55 11.94,51.82 v1(23.11,51.82) ; v1(26.67,41.4) 26.67,49.78 25.81,50.64 24.73,50.64 24.38,50.29 v1(23.11,50.29)
L4: length 7.6
  TOP w0.127: IC1.L4 27.05,46.38 26.52,46.38 26.4,46.25 26.4,45.91 26.22,45.73 25.27,45.73 22.47,42.93 R11.1
LINK_RX: length 39.5
  TOP w0.127: J3.8 9.91,16.76 9.97,16.83 R8.2 12.91,15.86 17.38,15.86 17.78,16.26 17.78,29.82 16.75,30.85 16.75,31.62 18.01,32.88 18.01,36.19 18.13,36.32 18.54,36.32 18.65,36.21 D2.3
LINK_TX: length 46.2
  TOP w0.127: 19.3,28.19 D2.5 ; 19.3,28.19 18.29,28.19 18.03,27.94 18.03,15.49 17.78,15.24 1.52,15.24 0.75,16.02 0.75,19.03 1.02,19.3 J3.7 ; 19.3,28.19 R7.2
M10: length 12.5
  TOP w0.127: C6.2 41.91,45.21 41.4,44.7 v1(37.59,44.7) ; IC1.M10 31.6,45.73 34.83,45.73 34.96,45.6 34.96,45.31 35.21,45.06 35.21,45.05 v1(35.56,44.7)
  BOTTOM w0.127: v1(37.59,44.7) v1(35.56,44.7)
M11: length 45.8
  TOP w0.127: v1(33.27,30.99) 31.92,32.34 31.92,43 32.25,43.32 32.25,45.08 IC1.M11 ; v1(15.49,23.88) 13.46,23.88 13.27,24.06 R14.1
  BOTTOM w0.127: v1(33.27,30.99) 33.27,26.67 32.77,26.16 27.43,26.16 27.18,25.91 27.18,23.11 26.67,22.61 18.8,22.61 17.53,23.88 v1(15.49,23.88)
N12: length 16.4
  TOP w0.127: IC3.4 29.06,39.47 29.21,39.62 v1(30.73,39.62) ; IC1.N12 32.9,44.43 34.82,44.43 35.56,43.69 v1(35.56,41.15)
  BOTTOM w0.127: v1(35.56,41.15) 35.56,39.88 35.31,39.62 v1(30.73,39.62)
NRST: length 65.1
  TOP w0.127: J3.4 3.3,26.92 4.57,25.65 J4.3 13.72,25.65 ; v1(15.49,21.34) v1(13.72,21.34) ; 13.72,25.65 v1(13.72,24.64) ; 13.72,25.65 v1(15.49,25.65) ; J5.10 9.52,39.12 9.65,38.99 9.65,38.22 9.91,37.96 v1(9.91,36.07) ; v1(23.11,20.57) 23.11,25.91 22.86,26.16 R19.2 ; v1(13.72,37.08) 13.72,34.29 13.97,34.04 v1(17.27,34.04) 17.27,36.07 17.02,36.32 16,36.32 15.64,35.96 D3.1
  BOTTOM w0.127: v1(17.27,34.04) 17.27,32.51 16.76,32 16,32 15.49,31.5 v1(15.49,25.65) ; v1(13.72,21.34) v1(13.72,24.64) ; v1(13.72,37.08) 11.94,37.08 10.92,36.07 v1(9.91,36.07) ; v1(23.11,20.57) 17.02,20.57 16.26,21.34 v1(15.49,21.34)
P3: length 45.8
  TOP w0.127: v1(33.02,36.83) v1(33.02,41.4) ; IC1.P3 27.05,44.43 29.47,44.43 29.65,44.25 29.65,43.32 29.46,43.14 v1(29.46,41.4) ; v1(21.34,23.62) 21.34,24.38 21.08,24.64 18.8,24.64 18.54,24.89 18.54,25.91 18.8,26.16 R19.1
  BOTTOM w0.127: v1(29.46,41.4) 29.46,41.91 29.72,42.16 32.77,42.16 33.02,41.91 v1(33.02,41.4) ; v1(33.02,36.83) 33.02,34.29 32.77,34.04 24.89,34.04 24.64,33.78 24.64,23.88 24.38,23.62 v1(21.34,23.62)
PA0: length 18.7
  TOP w0.127: IC1.N3 26.72,44.58 26.4,44.25 26.4,43.96 26.58,43.78 27.57,43.78 27.59,43.76 28.15,43.76 28.32,43.58 28.32,43.33 28.19,43.2 28.19,40.89 27.69,40.39 22.18,40.39 21.93,40.64 19.81,40.64 19.62,40.45 R3.1
  TOP w0.381: R2.2 R3.1
PB1: length 16.1
  TOP w0.127: IC1.R4 27.94,42.89 27.94,41.02 27.56,40.64 22.86,40.64 22.61,40.89 17.78,40.89 17.53,41.15 17.53,42.61 17.21,42.93 R1.1
R2: length 6.8
  TOP w0.381: R7.1 R4.2 29.06,29.43 IC3.21
R4: length 4
  TOP w0.127: IC1.G1 23.51,48.66 23.37,48.51 R30.2
R6: length 17.4
  TOP w0.127: 27.76,31.1 27.76,30.17 27.05,29.46 24.28,29.46 24.02,29.21 v1(23.11,29.21) ; R17.1 v1(19.56,23.62)
  BOTTOM w0.127: v1(19.56,23.62) 19.56,28.7 19.72,28.86 21.49,28.86 21.84,29.21 v1(23.11,29.21)
R9: length 4.8
  TOP w0.127: J2.B5 31.69,14.36 31.31,13.97 R9.1
R10: length 5.5
  TOP w0.127: R10.1 28.51,22.54 30.19,20.86 J2.A5
SWCLK/PA14: length 45.6
  TOP w0.127: IC1.A14 34.17,52.86 36.68,52.86 36.83,52.7 36.83,29.46 37.08,29.21 41.15,29.21 41.4,28.96 41.4,26.67 41.15,26.42 37.34,26.42 37.08,26.16 37.08,23.45 37.06,23.43 ; 37.06,23.43 D1.4 ; 37.06,23.43 37.78,23.43 38.35,22.86 J1.4
SWDIO/PA13: length 33.7
  TOP w0.127: 36.58,27.85 36.58,52.43 36.45,52.56 IC1.A15 ; 36.58,27.85 36.99,27.85 37.08,27.94 J1.2 ; 36.58,27.85 36.58,25.6 36.31,25.33 D1.6
TCLK/SWCLK: length 56.7
  TOP w0.127: 12.95,22.16 R14.2 9.08,22.16 8.13,23.11 J4.4 4.32,23.11 3.05,24.38 J3.5 ; 12.95,22.16 16.58,22.16 17.53,23.11 17.53,29.72 15.64,31.61 D3.6 ; 12.95,22.16 v1(12.95,23.11) ; v1(12.95,35.05) 12.95,36.07 10.41,38.61 10.41,46.48 10.16,46.74 J5.4
  BOTTOM w0.127: v1(12.95,35.05) 12.95,33.27 14.22,32 14.22,26.42 12.95,25.15 v1(12.95,23.11)
TDI: length 28.6
  TOP w0.127: v1(12.19,38.1) 14.22,38.1 14.48,37.85 14.48,35.82 14.34,35.68 D3.3 ; 10.92,33.78 10.92,37.31 9.91,38.32 9.91,41.53 9.78,41.66 J5.8 ; 10.92,33.78 R18.2 ; 10.92,33.78 v1(9.65,33.78)
  BOTTOM w0.127: v1(9.65,33.78) 9.65,34.8 9.14,35.31 9.14,37.59 9.65,38.1 v1(12.19,38.1)
TDO/SWO: length 62.1
  TOP w0.127: J5.6 9.91,44.2 10.16,43.94 10.16,38.43 12.19,36.4 12.19,31.75 12.45,31.5 v1(13.46,31.5) 13.97,31.5 14.34,31.86 D3.4 ; J4.6 v1(9.4,18.03) ; v1(19.56,16.26) R17.2
  BOTTOM w0.127: v1(13.46,31.5) 13.21,31.24 13.21,26.42 12.95,26.16 12.19,26.16 11.94,25.91 11.94,19.81 12.45,19.3 13.72,19.3 13.84,19.18 13.84,16.38 14.22,16 15.24,16 15.62,16.38 15.62,17.15 16.13,17.65 17.15,17.65 17.53,17.27 19.3,17.27 19.56,17.02 v1(19.56,16.26) 19.05,15.75 12.95,15.75 10.67,18.03 v1(9.4,18.03)
TMS/SWDIO: length 55.8
  TOP w0.127: v1(11.68,39.37) 11.18,39.37 10.67,39.88 10.67,48.77 10.16,49.28 J5.2 ; D3.5 14.99,31.33 13.27,29.61 13.27,28.19 R16.2 14.22,26.48 13.91,26.16 9.4,26.16 7.37,28.19 J4.2
  BOTTOM w0.127: v1(11.68,39.37) 11.68,38.86 11.43,38.61 9.14,38.61 8.64,38.1 8.64,28.7 8.13,28.19 J4.2 4.06,28.19 3.56,27.69 3.56,22.35 3.05,21.84 J3.6
VSENS: length 105.5
  TOP w0.381: v1(22.35,30.99) 22.35,35.94 21.97,36.32 20.32,36.32 19.95,35.96 D2.1 ; J4.1 v1(6.1,34.54) ; C9.2 19.74,55.88 19.69,55.93 S1.2 ; S1.2 16.76,57.15 17.27,57.66 v1(18.54,57.66) ; S1.2 15.46,55.93 15,56.39 5.84,56.39 5.08,55.63 5.08,49.78 4.57,49.28 J5.1 ; v1(25.65,24.13) 25.65,26.29 26.03,26.67 31.75,26.67 32.19,27.11 R4.1 32.19,30.46 31.55,31.1 IC3.24 IC3.23 ; v1(12.19,41.4) 12.19,40.13 12.7,39.62 R2.1
  GND w0.127: v1(11.43,44.45) 11.43,42.16 v1(12.19,41.4)
  POWER w0.381: v1(22.35,30.99) 22.35,24.89 23.11,24.13 v1(25.65,24.13) ; v1(18.54,57.66) 18.03,57.15 11.94,57.15 11.43,56.64 v1(11.43,44.45) 11.43,43.69 9.65,41.91 9.65,37.34 9.14,36.83 6.37,36.83 6.1,36.56 v1(6.1,34.54)
N39518: length 3.4
  TOP w0.508: R30.1 18.67,48.51 18.6,48.58 Y1.3
N52044: length 3.1
  TOP w0.508: LED2.2 37.61,60.97 37.62,60.96 R15.1
N52750: length 2.5
  TOP w0.508: LED1.2 R13.1

## Copper pours and planes (outline as drawn; the poured copper is in the pictures)
0 on TOP: 0.25,66.29 47.24,66.29 47.24,63.25 46.74,62.74 38.61,62.74 37.59,61.72 35.05,61.72 34.04,60.71 34.04,58.67 33.53,58.17 27.43,58.17 26.67,58.93 18.29,58.93 17.53,58.17 16.51,58.17 15.49,57.15 14.22,57.15 13.72,56.64 13.72,54.86 14.22,54.36 15.24,54.36 15.75,53.85 16.76,53.85 17.27,53.34 17.27,51.05 17.02,50.8 6.6,50.8 6.1,50.29 6.1,39.37 6.35,39.12 6.35,38.1 5.59,37.34 0.25,37.34
0 on TOP: 21.34,57.4 21.34,58.93 19.56,58.93 19.56,57.4
0 on TOP: 0.25,0.25 0.25,11.43 47.24,11.43 47.24,0.25
0 on TOP: 27.69,50.29 27.69,45.97 32.26,45.97 32.26,50.29
0 on GND: 0.25,66.29 0.25,0.25 47.24,0.25 47.24,66.29
